# EAGLE board Light Engine_LED_Base_Board (EAGLE 9.7.0)

Size 100 x 100 mm. Coordinates in mm from the lower left corner, seen from the top.
Outline: circle at 50,50 radius 50
Outline: circle at 50,50 radius 50
Copper layers (1*16): Top / Bottom
Stack-up Default Layer Stack: Top User Defined 0.035mm / Dielectric-1 User Defined 1.5mm / Bottom User Defined 0.035mm
Design rules "default": minimum track width 6mil, minimum drill 0.35mm, track to track 6mil, track to pad 6mil, pad to pad 6mil, via to via 6mil, smd to smd 6mil, copper to edge 40mil, drill to drill 6mil, minimum pad ring 10mil, minimum via ring 8mil, stop-mask expansion 4mil, vias tented up to drill 0mil, thermal gap 10mil
Holes 3.3 mm at 15,70 85,70 50,10
Holes 3 mm at 50,65 50,35 35,89 65,89 91,43 76,18 9,43 24,18

## Footprints (pad centres in the part's own frame; a part is rotated, then mirrored left to right if it is on the bottom)
VL-H01XWX5 = smd 3.3 x 4.2 rotated 120: A -4.03,6.8; C 3.83,-6.73

## Placement (x,y rotation side)
LED1  VOLLONG-5W-HIGHPOWER-LEDVL  [VL-H01XWX5]  50,50 0 bottom
LED2  VOLLONG-5W-HIGHPOWER-LEDVL  [VL-H01XWX5]  50,89 0 bottom
LED3  VOLLONG-5W-HIGHPOWER-LEDVL  [VL-H01XWX5]  17,31 0 bottom
LED4  VOLLONG-5W-HIGHPOWER-LEDVL  [VL-H01XWX5]  83,31 0 bottom

## Library data of the parts
LED1-LED4 = myLibrary; PN: VL-H01WW30005